# EAGLE board PCB (EAGLE 9.7.0)
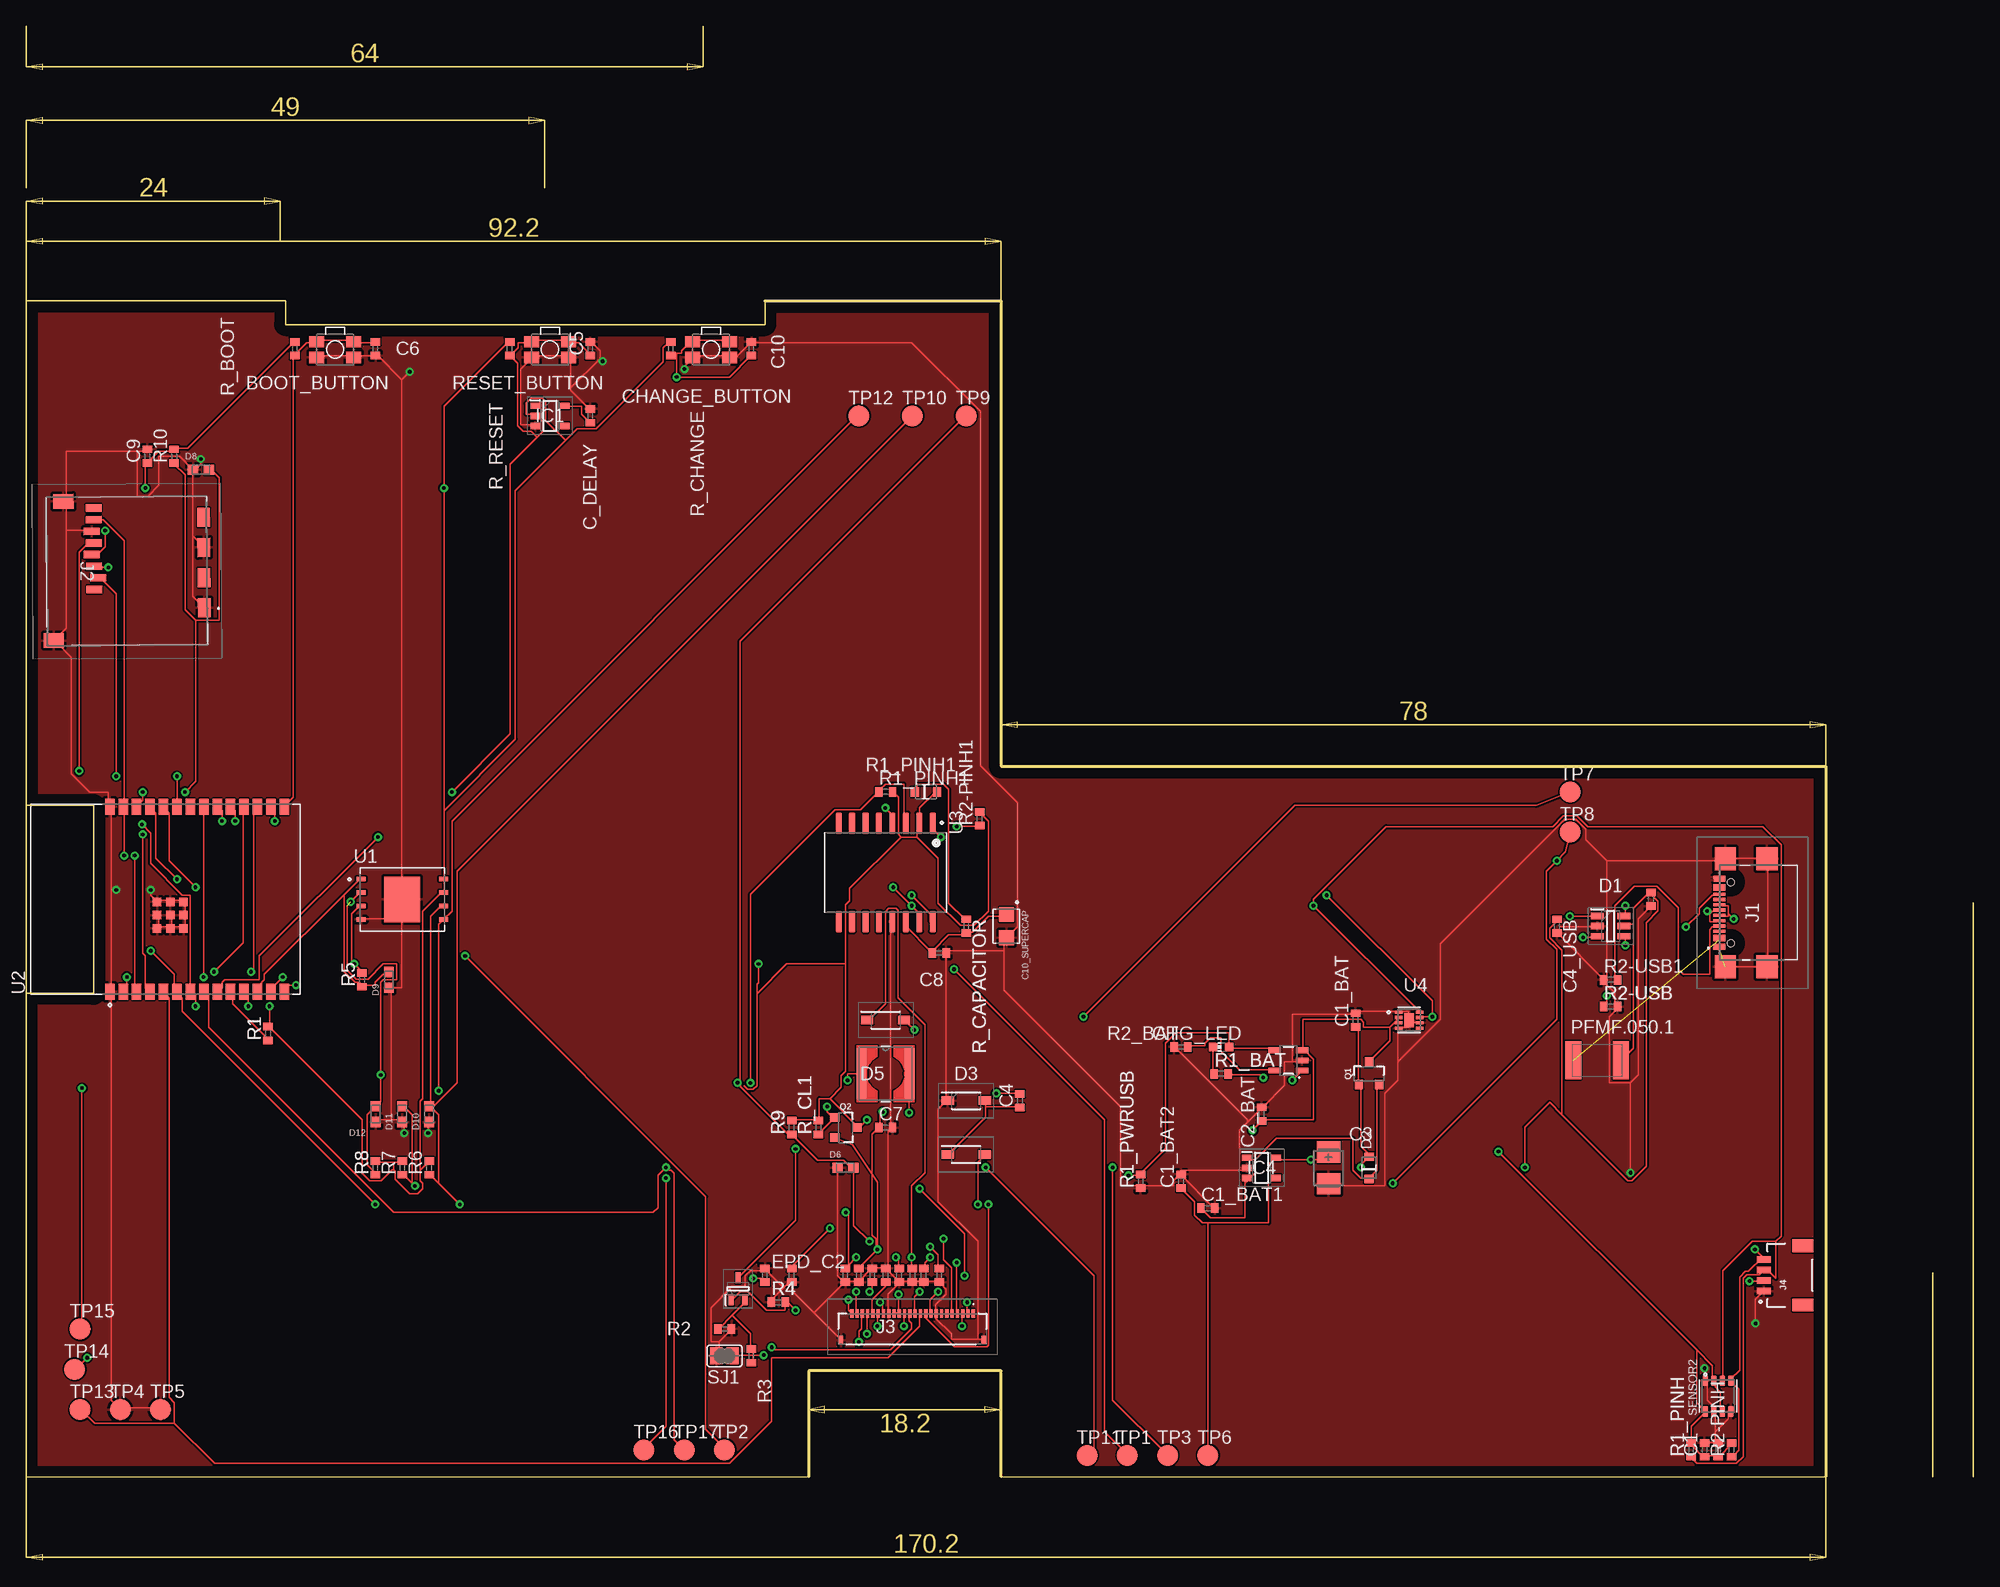
[diagram p0: board, top side]
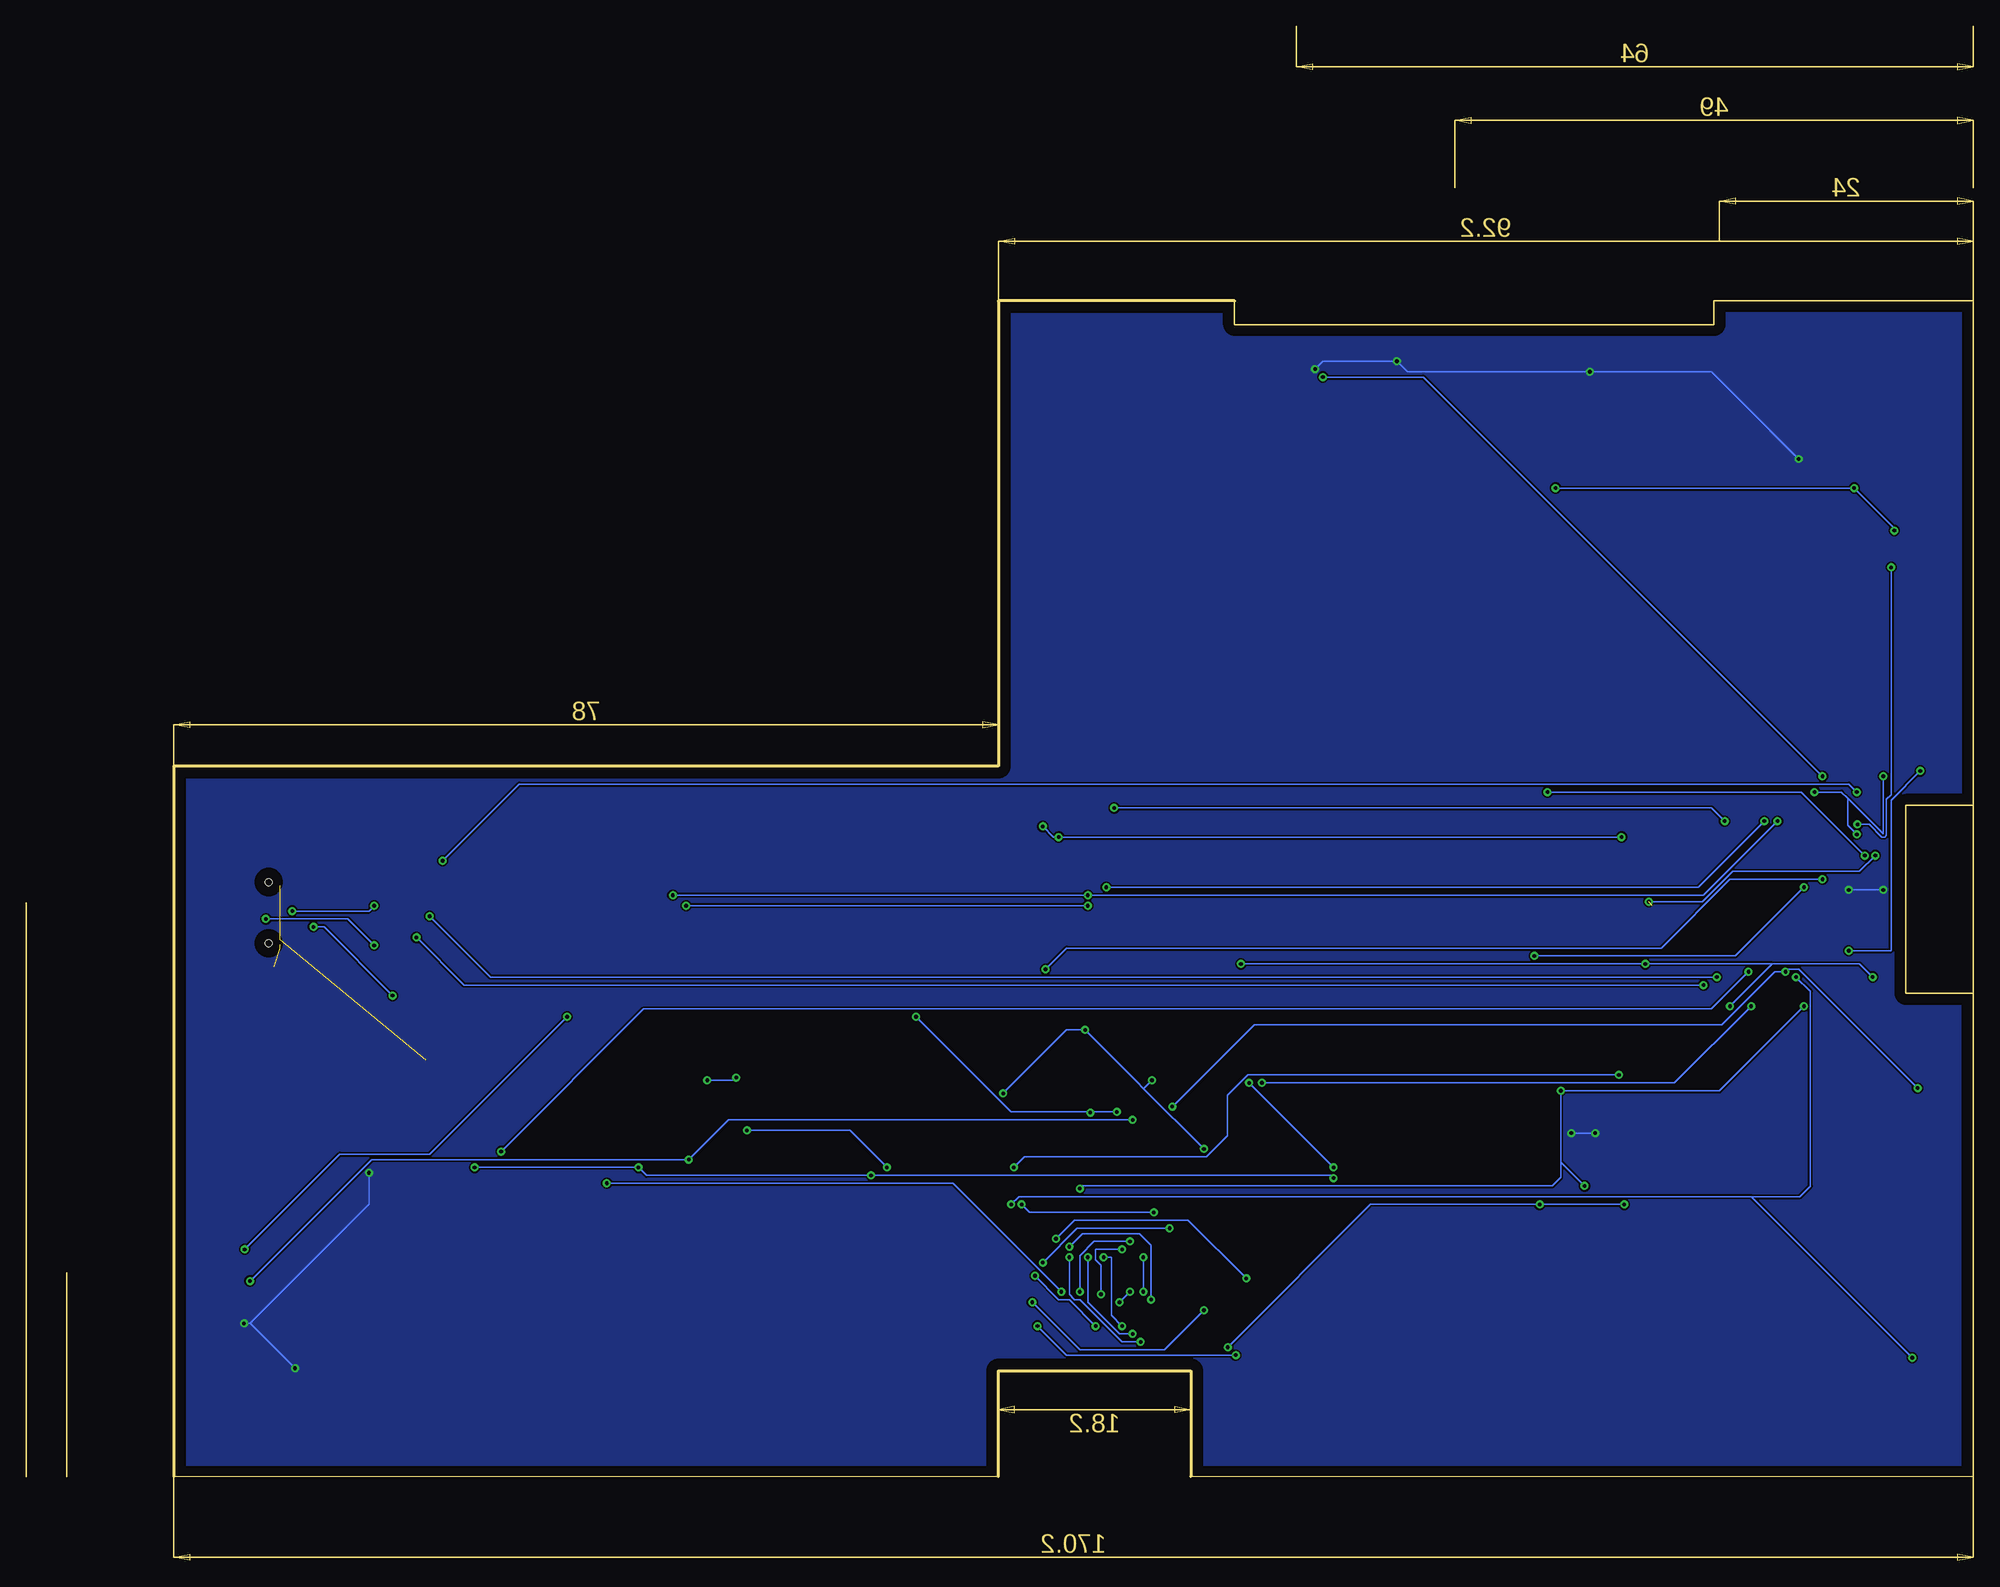
[diagram p1: board, bottom side, seen from below]

Size 170.2 x 111.2 mm. Coordinates in mm from the lower left corner, seen from the top.
Outline: 0,0 74,0 74,10 92.2,10 92.2,0 170.2,0 170.2,67.2 92.2,67.2 92.2,111.2 69.85,111.2 69.85,108.97 24.5,108.97 24.5,111.2 0,111.2 0,63.5 6.35,63.5 6.35,45.72 0,45.72 0,0
Copper layers (1*16): Top 0.035mm / dielectric 1.5mm / Bottom 0.035mm
Design rules "Fusion Electronics Design Rules": minimum track width 6mil, minimum drill 0.35mm, track to track 6mil, track to pad 6mil, pad to pad 6mil, via to via 6mil, smd to smd 6mil, copper to edge 40mil, drill to drill 6mil, minimum pad ring 10mil, minimum via ring 8mil, stop-mask expansion 4mil, vias tented up to drill 9999mil, thermal gap 10mil

## Footprints (pad centres in the part's own frame; a part is rotated, then mirrored left to right if it is on the bottom)
MYBUTTON = smd 1.4 x 1.05: 1 1.75,0.75; 2 -1.75,0.75; 3 -1.75,-0.75; 4 1.75,-0.75
EAGLE-LTSPICE_C0402 = smd 0.7 x 0.9: 1 -0.65,0; 2 0.65,0
ESP32_WROVER_EAGLE-LTSPICE_C0402 = smd 0.7 x 0.9: 1 -0.65,0; 2 0.65,0
RCL_CT3528 = smd 2 x 2.2: + -1.5,0; - 1.5,0
CAPCP3225X100N = smd 1.4 x 1.4: 1 -1.1,0; 2 1.1,0
ADAFRUIT_CHIP-LED0603 = smd 0.8 x 0.8: A 0,-0.75; C 0,0.75
SOT95P280X145-6N = smd 1.2 x 0.6: 1 -1.25,0.95; 2 -1.25,0; 3 -1.25,-0.95; 4 1.25,-0.95; 5 1.25,0; 6 1.25,0.95
ESP32_WROVER_AVX---SD0805S020S1R0_AVX_SD0805S020S1R0_0 = smd 0.8 x 0.9: 1 -1.05,0; 2 1.05,0
SOD3716X135N = smd 1.15 x 0.8: 1 -1.75,0; 2 1.75,0
DIOC1608X36N = smd 0.97 x 0.94: 1 -0.75,0; 2 0.75,0
SOT95P280X125-5N = smd 0.9 x 0.6: 1 -1.4,0.95; 2 -1.4,0; 3 -1.4,-0.95; 4 1.4,-0.95; 5 1.4,0.95
SOT95P280X120-5N = smd 0.9 x 0.6: 1 -1.4,0.95; 2 -1.4,0; 3 -1.4,-0.95; 4 1.4,-0.95; 5 1.4,0.95
SAMACSYS_PARTS_USB4110GFA = smd 0.3 x 1.15: A1 -3.35,3.678; A4 -2.55,3.678; A5 -1.25,3.678; A6 -0.25,3.678; A7 0.25,3.678; A8 1.25,3.678; A9 2.55,3.678; A12 3.35,3.678; B4 2.25,3.678; B5 1.75,3.678; B6 0.75,3.678; B7 -0.75,3.678; B8 -1.75,3.678; B9 -2.25,3.678 | smd 0.249 x 1.099: B1 3.05,3.678; B12 -3.05,3.678 | smd 2.18 x 2: MP1 -5.11,-0.827; MP2 5.11,-0.827; MP3 -5.11,3.103; MP4 5.11,3.103 | hole 0.65: -2.89,2.603; 2.89,2.603
112ATAARR03ATTEND = smd 1.8 x 1.2: G1 10.6,10.4; G2 4.9,10.4; S1 7.75,10.4; S2 2.05,10.4 | smd 1.4 x 1.9: G3 13.6,-3.85; G4 0.45,-2.85 | smd 0.7 x 1.5: P1 8.8,0; P2 7.7,0.4; P3 6.6,0; P4 5.5,-0.2; P5 4.4,0; P6 3.3,-0.2; P7 2.2,0; P8 1.1,0
FH34SRJ24S05SH99 = smd 0.3 x 0.8: 1 5.75,1.45; 2 5.25,1.45; 3 4.75,1.45; 4 4.25,1.45; 5 3.75,1.45; 6 3.25,1.45; 7 2.75,1.45; 8 2.25,1.45; 9 1.75,1.45; 10 1.25,1.45; 11 0.75,1.45; 12 0.25,1.45; 13 -0.25,1.45; 14 -0.75,1.45; 15 -1.25,1.45; 16 -1.75,1.45; 17 -2.25,1.45; 18 -2.75,1.45; 19 -3.25,1.45; 20 -3.75,1.45; 21 -4.25,1.45; 22 -4.75,1.45; 23 -5.25,1.45; 24 -5.75,1.45 | smd 0.4 x 0.8: MP1 6.75,-1.05; MP2 -6.75,-1.05
JST04_1MM_RA = smd 0.6 x 1.35: 1 -1.5,0; 2 -0.5,0; 3 0.5,0; 4 1.5,0 | smd 1.2 x 2: NC1 2.8,-3.675; NC2 -2.8,-3.675
IND_4828-WE-TPC_WRE = smd 0.889 x 4.826: 1 -2.286,0; 2 2.286,0
ESP32_WROVER_SPARKFUN-IC-POWER_SOT23-5 = smd 0.55 x 1.2: 1 -0.95,-1.3; 2 0,-1.3; 3 0.95,-1.3; 4 0.95,1.3; 5 -0.95,1.3
ESP32C6_VARISTOR_CT/CN1812 = smd 1.5 x 3.6: 1 -2.25,0; 2 2.25,0
ESP32_WROVER_SPARKFUN-DISCRETESEMI_SOT23-3 = smd 0.8 x 0.9: 1 -0.95,-1; 2 0.95,-1; 3 0,1.1
SOT65P210X110-3N = smd 1.05 x 0.5: 1 -1.05,0.65; 2 -1.05,-0.65; 3 1.05,0
ESP32_WROVER_EAGLE-LTSPICE_R0402 = smd 0.7 x 0.9: 1 -0.65,0; 2 0.65,0
ESP32_WROVER_BME680_PSON80P300X300X100-8N = smd 1.016 x 0.5: 1 1.458,1.2; 2 1.458,0.4; 3 1.458,-0.4; 4 1.458,-1.2; 5 -1.458,-1.22; 6 -1.458,-0.4; 7 -1.458,0.4; 8 -1.458,1.2
SJ = smd 1.168 x 1.6: 1 -0.762,0; 2 0.762,0
TP20R = smd 2 x 2: TP 0,0
SON127P600X800X80-9N = smd 0.94 x 0.44: 1 -3.895,1.905; 2 -3.895,0.635; 3 -3.895,-0.635; 4 -3.895,-1.905; 5 3.895,-1.905; 6 3.895,-0.635; 7 3.895,0.635; 8 3.895,1.905 | smd 3.4 x 4.3: 9 0,0
XCVR_ESP32-C6-WROOM-1-N8 = smd 1.5 x 0.9: 1 -8.75,5.26; 2 -8.75,3.99; 3 -8.75,2.72; 4 -8.75,1.45; 5 -8.75,0.18; 6 -8.75,-1.09; 7 -8.75,-2.36; 8 -8.75,-3.63; 9 -8.75,-4.9; 10 -8.75,-6.17; 11 -8.75,-7.44; 12 -8.75,-8.71; 13 -8.75,-9.98; 14 -8.75,-11.25; 15 8.75,-11.25; 16 8.75,-9.98; 17 8.75,-8.71; 18 8.75,-7.44; 19 8.75,-6.17; 20 8.75,-4.9; 21 8.75,-3.63; 22 8.75,-2.36; 23 8.75,-1.09; 24 8.75,0.18; 25 8.75,1.45; 26 8.75,2.72; 27 8.75,3.99; 28 8.75,5.26 | smd 0.8 x 0.8: 29_1 -2.755,0.79; 29_2 -1.505,0.79; 29_3 -0.255,0.79; 29_4 -2.755,-0.46; 29_5 -1.505,-0.46; 29_6 -0.255,-0.46; 29_7 -2.755,-1.71; 29_8 -1.505,-1.71; 29_9 -0.255,-1.71
SOIC127P1032X265-16N = smd 2.05 x 0.59: 1 -4.655,4.445; 2 -4.655,3.175; 3 -4.655,1.905; 4 -4.655,0.635; 5 -4.655,-0.635; 6 -4.655,-1.905; 7 -4.655,-3.175; 8 -4.655,-4.445; 9 4.655,-4.445; 10 4.655,-3.175; 11 4.655,-1.905; 12 4.655,-0.635; 13 4.655,0.635; 14 4.655,1.905; 15 4.655,3.175; 16 4.655,4.445
SON50P200X200X80-9N = smd 0.76 x 0.27: 1 -0.985,0.75; 2 -0.985,0.25; 3 -0.985,-0.25; 4 -0.985,-0.75; 5 0.985,-0.75; 6 0.985,-0.25; 7 0.985,0.25; 8 0.985,0.75 | smd 0.9 x 1.3: 9 0,0

## Placement (x,y rotation side)
BOOT_BUTTON  BUTTON_CUSYOMV1  [MYBUTTON]  29.21,106.6 180 top
C1  100nF  [EAGLE-LTSPICE_C0402]  158.75,2.54 90 top
C1_BAT  4.7uF  [ESP32_WROVER_EAGLE-LTSPICE_C0402]  125.73,43.18 90 top
C1_BAT1  4.7uF  [EAGLE-LTSPICE_C0402]  111.76,25.4 0 top
C1_BAT2  4.7uF  [EAGLE-LTSPICE_C0402]  109.22,27.94 90 top
C2  100nF  [EAGLE-LTSPICE_C0402]  160.02,2.54 90 top
C2_BAT  4.7uF  [EAGLE-LTSPICE_C0402]  116.84,34.29 90 top
C3  100uF  [RCL_CT3528]  123.19,29.21 270 top
C4  4.7uF/25V  [EAGLE-LTSPICE_C0402]  93.98,35.56 90 top
C4_USB  100nF  [ESP32_WROVER_EAGLE-LTSPICE_C0402]  144.78,52.07 270 top
C5  1uF  [EAGLE-LTSPICE_C0402]  53.34,106.68 90 top
C5_USB  4.7uF  [ESP32_WROVER_EAGLE-LTSPICE_C0402]  153.67,54.61 270 top
C6  100nF  [EAGLE-LTSPICE_C0402]  33.02,106.68 270 top
C7  10uF  [EAGLE-LTSPICE_C0402]  81.28,33.02 0 top
C8  100nF  [EAGLE-LTSPICE_C0402]  86.36,49.53 0 top
C9  100nF  [ESP32_WROVER_EAGLE-LTSPICE_C0402]  11.43,96.52 90 top
C10  100nF  [EAGLE-LTSPICE_C0402]  68.58,106.68 90 top
C10_SUPERCAP  CPH3225A  [CAPCP3225X100N]  92.71,52.07 270 top
C_DELAY  100nF  [EAGLE-LTSPICE_C0402]  53.34,100.33 90 top
CHANGE_BUTTON  BUTTON_CUSYOMV1  [MYBUTTON]  64.77,106.6 180 top
CHG_LED  [ADAFRUIT_CHIP-LED0603]  113.03,40.64 90 top
D1  USBLC6-2SC6Y  [SOT95P280X145-6N]  149.86,52.07 0 top
D2  ESP32_WROVER_AVX---SD0805S020S1R0_AVX_SD0805S020S1R0_0_0AVX_SD0805S020S1R0_0_0  [ESP32_WROVER_AVX---SD0805S020S1R0_AVX_SD0805S020S1R0_0]  127,29.21 90 top
D3  MBR0530  [SOD3716X135N]  88.9,35.56 0 top
D4  MBR0530  [SOD3716X135N]  88.9,30.48 0 top
D5  MBR0530  [SOD3716X135N]  81.28,43.18 0 top
D6  PGB1010603MR  [DIOC1608X36N]  77.47,29.21 0 top
D7  ESP32_WROVER_AVX---SD0805S020S1R0_AVX_SD0805S020S1R0_0_0AVX_SD0805S020S1R0_0_0  [ESP32_WROVER_AVX---SD0805S020S1R0_AVX_SD0805S020S1R0_0]  85.09,64.77 0 top
D8  PGB1010603MR  [DIOC1608X36N]  16.51,95.25 0 top
D9  PGB1010603MR  [DIOC1608X36N]  34.29,46.99 90 top
D10  PGB1010603MR  [DIOC1608X36N]  38.1,34.29 90 top
D11  PGB1010603MR  [DIOC1608X36N]  35.56,34.29 90 top
D12  PGB1010603MR  [DIOC1608X36N]  33.02,34.29 90 top
EPD_C1  1uF/50V  [EAGLE-LTSPICE_C0402]  72.39,19.05 90 top
EPD_C2  1uF/50V  [EAGLE-LTSPICE_C0402]  69.85,19.05 270 top
EPD_C5  1uF/50V  [EAGLE-LTSPICE_C0402]  78.74,19.05 90 top
EPD_C6  1uF/50V  [EAGLE-LTSPICE_C0402]  80.01,19.05 270 top
EPD_C7  1uF/50V  [EAGLE-LTSPICE_C0402]  82.55,19.05 90 top
EPD_C8  1uF/50V  [EAGLE-LTSPICE_C0402]  81.28,19.05 270 top
EPD_C9  1uF/50V  [EAGLE-LTSPICE_C0402]  83.82,19.05 90 top
EPD_C10  [EAGLE-LTSPICE_C0402]  84.87,19.05 90 top
EPD_C11  1uF/50V  [EAGLE-LTSPICE_C0402]  77.47,19.05 90 top
EPD_C12  1uF/50V  [EAGLE-LTSPICE_C0402]  86.36,19.05 90 top
IC1  BD5229G-TR  [SOT95P280X125-5N]  49.53,100.33 0 top
IC4  XC6220A331MR-G  [SOT95P280X120-5N]  116.84,29.21 0 top
J1  SAMACSYS_PARTS_USB4110-GF-A  [SAMACSYS_PARTS_USB4110GFA]  163.83,53.34 90 top
J2  112A-TAAR-R03_ATTEND  [112ATAARR03ATTEND]  6.35,92.71 270.4 top
J3  FH34SRJ-24S-0.5SH_99_  [FH34SRJ24S05SH99]  83.82,13.97 0 top
J4  QWIIC_RIGHT_ANGLE  [JST04_1MM_RA]  164.36,19.05 90 top
L1  744043680IND_4828-WE-TPC_WRE  [IND_4828-WE-TPC_WRE]  81.28,38.1 0 top
MCP73831  ESP32_WROVER_SPARKFUN-IC-POWER_MCP73831  [ESP32_WROVER_SPARKFUN-IC-POWER_SOT23-5]  119.38,39.37 90 top
PFMF.050.1  ESP32C6_VARISTORCN1812  [ESP32C6_VARISTOR_CT/CN1812]  148.59,39.37 0 top
Q1  20V/4.2A/52mΩ/1.4W  [ESP32_WROVER_SPARKFUN-DISCRETESEMI_SOT23-3]  127,38.1 0 top
Q2  20V/4.2A/52mΩ/1.4W  [ESP32_WROVER_SPARKFUN-DISCRETESEMI_SOT23-3]  77.47,33.02 270 top
Q3  SI1308EDL-T1-GE3  [SOT65P210X110-3N]  67.31,17.78 90 top
R1  10K  [ESP32_WROVER_EAGLE-LTSPICE_R0402]  22.86,41.91 90 top
R1_BAT  200  [ESP32_WROVER_EAGLE-LTSPICE_R0402]  113.03,38.1 0 top
R1_PINH  10k  [ESP32_WROVER_EAGLE-LTSPICE_R0402]  157.48,2.54 90 top
R1_PINH1  10k  [ESP32_WROVER_EAGLE-LTSPICE_R0402]  81.28,64.77 0 top
R1_PWRUSB  100k  [ESP32_WROVER_EAGLE-LTSPICE_R0402]  105.41,27.94 90 top
R2  2.2  [ESP32_WROVER_EAGLE-LTSPICE_R0402]  66.04,13.97 180 top
R2-PINH  10k  [ESP32_WROVER_EAGLE-LTSPICE_R0402]  161.29,2.54 90 top
R2-PINH1  10k  [ESP32_WROVER_EAGLE-LTSPICE_R0402]  90.17,62.23 90 top
R2-USB  5k1  [ESP32_WROVER_EAGLE-LTSPICE_R0402]  149.86,44.45 0 top
R2-USB1  5k1  [ESP32_WROVER_EAGLE-LTSPICE_R0402]  149.86,46.99 0 top
R2_BAT  2k  [ESP32_WROVER_EAGLE-LTSPICE_R0402]  109.22,40.64 0 top
R3  0.47  [ESP32_WROVER_EAGLE-LTSPICE_R0402]  68.58,11.43 90 top
R4  10K  [ESP32_WROVER_EAGLE-LTSPICE_R0402]  71.12,16.51 0 top
R5  10k  [ESP32_WROVER_EAGLE-LTSPICE_R0402]  31.75,46.99 90 top
R6  10k  [ESP32_WROVER_EAGLE-LTSPICE_R0402]  38.1,29.21 90 top
R7  10k  [ESP32_WROVER_EAGLE-LTSPICE_R0402]  35.56,29.21 90 top
R8  10k  [ESP32_WROVER_EAGLE-LTSPICE_R0402]  33.02,29.21 90 top
R9  10k  [ESP32_WROVER_EAGLE-LTSPICE_R0402]  72.39,33.02 90 top
R10  10k  [ESP32_WROVER_EAGLE-LTSPICE_R0402]  13.97,96.52 90 top
R_BOOT  10k  [ESP32_WROVER_EAGLE-LTSPICE_R0402]  25.4,106.68 90 top
R_CAPACITOR  15  [ESP32_WROVER_EAGLE-LTSPICE_R0402]  88.9,52.07 270 top
R_CHANGE  10k  [ESP32_WROVER_EAGLE-LTSPICE_R0402]  60.96,106.68 90 top
R_CL1  10k  [ESP32_WROVER_EAGLE-LTSPICE_R0402]  74.93,33.02 90 top
R_RESET  10k  [ESP32_WROVER_EAGLE-LTSPICE_R0402]  45.72,106.68 90 top
RESET_BUTTON  BUTTON_CUSYOMV1  [MYBUTTON]  49.53,106.6 180 top
SENSOR2  ESP32_WROVER_BME680_BME680  [ESP32_WROVER_BME680_PSON80P300X300X100-8N]  160.02,7.62 90 top
SJ1  [SJ]  66.04,11.43 0 top
TP1  TPTP20R  [TP20R]  104.14,2.02 0 top
TP2  TPTP20R  [TP20R]  66.04,2.54 0 top
TP3  TPTP20R  [TP20R]  107.95,2.02 0 top
TP4  TPTP20R  [TP20R]  8.89,6.35 0 top
TP5  TPTP20R  [TP20R]  12.7,6.35 0 top
TP6  TPTP20R  [TP20R]  111.76,2.02 0 top
TP7  TPTP20R  [TP20R]  146.05,64.77 0 top
TP8  TPTP20R  [TP20R]  146.05,60.96 0 top
TP9  TPTP20R  [TP20R]  88.9,100.33 0 top
TP10  TPTP20R  [TP20R]  83.82,100.33 0 top
TP11  TPTP20R  [TP20R]  100.33,2.02 0 top
TP12  TPTP20R  [TP20R]  78.74,100.33 0 top
TP13  TPTP20R  [TP20R]  5.08,6.35 0 top
TP14  TPTP20R  [TP20R]  4.56,10.16 0 top
TP15  TPTP20R  [TP20R]  5.08,13.97 0 top
TP16  TPTP20R  [TP20R]  58.42,2.54 0 top
TP17  TPTP20R  [TP20R]  62.23,2.54 0 top
U1  W25Q512JVEIQ  [SON127P600X800X80-9N]  35.56,54.61 0 top
U2  ESP32-C6-WROOM-1-N8  [XCVR_ESP32-C6-WROOM-1-N8]  13.15,54.61 90 top
U3  DS3231SN#  [SOIC127P1032X265-16N]  81.28,57.15 270 top
U4  MAX17048G+T10  [SON50P200X200X80-9N]  130.81,43.18 0 top

## Library data of the parts
BOOT_BUTTON CHANGE_BUTTON CHG_LED PFMF.050.1 RESET_BUTTON SJ1 TP1-TP17 = DeskAssistant v19 v1
C1 C1_BAT C1_BAT1 C1_BAT2 C2 C2_BAT C4 C4_USB C5 C5_USB C6-C10 C_DELAY EPD_C1 EPD_C2 EPD_C5-EPD_C12 = DeskAssistant v19 v1; SPICEMODEL: NONE; SPICEPREFIX: C
C3 = DeskAssistant v19 v1; SPICEPREFIX: C
C10_SUPERCAP = DeskAssistant v19 v1; AVAILABILITY: Not in stock; CHECK_PRICES: https://www.snapeda.com/parts/CPH3225A/Seiko+Instruments/view-part/?ref=eda; DESCRIPTION: 11 mF (EDLC) Supercapacitor 3.3 V 1210 (3225 Metric) - -; MF: Seiko Instruments; MP: CPH3225A; PACKAGE: 1210 Seiko; PRICE: None; PURCHASE-URL: https://www.snapeda.com/api/url_track_click_mouser/?unipart_id=562593&manufacturer=Seiko Instruments&part_name=CPH3225A&search_term=None; SNAPEDA_LINK: https://www.snapeda.com/parts/CPH3225A/Seiko+Instruments/view-part/?ref=snap
D1 = DeskAssistant v19 v1; AVAILABILITY: In Stock; CHECK_PRICES: https://www.snapeda.com/parts/USBLC6-2SC6Y/STMicroelectronics/view-part/?ref=eda; DESCRIPTION: 17V Clamp 5A (8/20µs) Ipp Tvs Diode Surface Mount SOT-23-6; MF: STMicroelectronics; MP: USBLC6-2SC6Y; PACKAGE: SOT-23-6 STMicroelectronics; PRICE: None; SNAPEDA_LINK: https://www.snapeda.com/parts/USBLC6-2SC6Y/STMicroelectronics/view-part/?ref=snap
D2 D7 = DeskAssistant v19 v1; CENTROID_NOT_SPECIFIED: No; DATASHEET: http://datasheets.avx.com/schottky.pdf; DIGIKEY_DESCRIPTION: DIODE SCHOTTKY 20V 1A 0805; DIGIKEY_PART_NUMBER: 478-7800-1-ND; LEAD_FREE: yes; MF: AVX; MOUSER_PART_NUMBER: 581-SD0805S020S1R0; PACKAGE: 0805 (2012 metric); PREFIX: D; ROHS: yes; TEMPERATURE_RANGE_HIGH: +125°C; TEMPERATURE_RANGE_LOW: -55°C
D3-D5 = DeskAssistant v19 v1; AVAILABILITY: In Stock; CHECK_PRICES: https://www.snapeda.com/parts/MBR0530/Onsemi/view-part/?ref=eda; DESCRIPTION: Diode Schottky 30 V 500mA Surface Mount SOD-123; MF: ON Semiconductor; MP: MBR0530; PACKAGE: SOD-123-2 ON Semiconductor; PRICE: None; PURCHASE-URL: https://www.snapeda.com/api/url_track_click_mouser/?unipart_id=179458&manufacturer=ON Semiconductor&part_name=MBR0530&search_term=None; SNAPEDA_LINK: https://www.snapeda.com/parts/MBR0530/Onsemi/view-part/?ref=snap
D6 D8-D12 = DeskAssistant v19 v1; AVAILABILITY: In Stock; CHECK_PRICES: https://www.snapeda.com/parts/PGB1010603MR/Littelfuse/view-part/?ref=eda; DESCRIPTION: 150V (Typ) Clamp - Ipp Tvs Diode Surface Mount 0603 (1608 Metric); MF: Littelfuse Inc.; MP: PGB1010603MR; PACKAGE: 0603 Littelfuse Inc.; PRICE: None; PURCHASE-URL: https://www.snapeda.com/api/url_track_click_mouser/?unipart_id=5659453&manufacturer=Littelfuse Inc.&part_name=PGB1010603MR&search_term=None; SNAPEDA_LINK: https://www.snapeda.com/parts/PGB1010603MR/Littelfuse/view-part/?ref=snap
IC1 = DeskAssistant v19 v1; DESCRIPTION: Voltage Detector with Adjustable Delay Time: CMOS processes are utilized to develop high precision, low current consumption CMOS reset ICs that allow arbitrary setting of the delay time. The extensive lineup includes both Nch Open Drain and CMOS output types in a wide range of detection voltages (from 2.3V to 6.0V, in 0.1V steps), enabling selection of the ideal solution based on customer requirements. In addition, the entire series is of course both lead-free and RoHS-compliant.; HEIGHT: 1.25mm; MANUFACTURER_NAME: ROHM Semiconductor; MANUFACTURER_PART_NUMBER: BD5229G-TR; MOUSER_PART_NUMBER: 755-BD5229G-TR; MOUSER_PRICE-STOCK: https://www.mouser.co.uk/ProductDetail/ROHM-Semiconductor/BD5229G-TR?qs=4kLU8WoGk0vvnhrrYwdszw%3D%3D
IC4 = DeskAssistant v19 v1; DESCRIPTION: LDO Voltage Regulators; HEIGHT: 1.2mm; MANUFACTURER_NAME: Torex; MANUFACTURER_PART_NUMBER: XC6220A331MR-G; MOUSER_PART_NUMBER: 865-XC6220A331MR-G; MOUSER_PRICE-STOCK: https://www.mouser.co.uk/ProductDetail/Torex-Semiconductor/XC6220A331MR-G?qs=AsjdqWjXhJ8ZSWznL1J0gg%3D%3D
J1 = DeskAssistant v19 v1; DESCRIPTION: CONN USB 2.0 TYPE-C R/A SMT; HEIGHT: 3.26mm; MANUFACTURER_NAME: GCT (GLOBAL CONNECTOR TECHNOLOGY); MANUFACTURER_PART_NUMBER: USB4110-GF-A; MOUSER_PART_NUMBER: 640-USB4110-GF-A; MOUSER_PRICE-STOCK: https://www.mouser.co.uk/ProductDetail/GCT/USB4110-GF-A?qs=KUoIvG%2F9IlYiZvIXQjyJeA%3D%3D
J2 = DeskAssistant v19 v1; DESCRIPTION: Micro SD Card Socket, Push-Push Type, Top Mount, SMT, H=1.83mm, 10u; HEIGHT: 1.9mm; MANUFACTURER_NAME: ATTEND; MANUFACTURER_PART_NUMBER: 112A-TAAR-R03 ATTEND
J3 = DeskAssistant v19 v1; DESCRIPTION: 24 Position FFC, FPC Connector Contacts, Top and Bottom 0.020" (0.50mm) Surface Mount, Right Angle; HEIGHT: 1.1mm; MANUFACTURER_NAME: Hirose; MANUFACTURER_PART_NUMBER: FH34SRJ-24S-0.5SH(99); MOUSER_PART_NUMBER: 798-FH34SRJ24S05SH99; MOUSER_PRICE-STOCK: https://www.mouser.co.uk/ProductDetail/Hirose-Connector/FH34SRJ-24S-0.5SH99?qs=vcbW%252B4%252BSTIpKBl5ap9J8Fw%3D%3D
J4 = DeskAssistant v19 v1; PROD_ID: CONN-13694
L1 = DeskAssistant v19 v1; COPYRIGHT: Copyright (C) 2024 Ultra Librarian. All rights reserved.; MANUFACTURER_PART_NUMBER: 744043680; MFR_NAME: Wurth Electronics
MCP73831 = DeskAssistant v19 v1; PROD_ID: IC-09995
Q1 Q2 = DeskAssistant v19 v1; PROD_ID: TRAN-14388
Q3 = DeskAssistant v19 v1; AVAILABILITY: In Stock; CHECK_PRICES: https://www.snapeda.com/parts/SI1308EDL-T1-GE3/Vishay+Siliconix/view-part/?ref=eda; DESCRIPTION: Si1308EDL-T1-GE3 N-channel MOSFET Transistor, 1.5 A, 30 V, 3-Pin SC-70 | Siliconix / Vishay SI1308EDL-T1-GE3; MF: Vishay Siliconix; MP: SI1308EDL-T1-GE3; PACKAGE: SOT-323 Vishay Semiconductor; PRICE: None; PURCHASE-URL: https://www.snapeda.com/api/url_track_click_mouser/?unipart_id=274603&manufacturer=Vishay Siliconix&part_name=SI1308EDL-T1-GE3&search_term=None; SNAPEDA_LINK: https://www.snapeda.com/parts/SI1308EDL-T1-GE3/Vishay+Siliconix/view-part/?ref=snap
R1 R1_BAT R1_PINH R1_PINH1 R1_PWRUSB R2 R2-PINH R2-PINH1 R2-USB R2-USB1 R2_BAT R3-R10 R_BOOT R_CAPACITOR R_CHANGE R_CL1 R_RESET = DeskAssistant v19 v1; SPICEMODEL: NONE; SPICEPREFIX: R
SENSOR2 = DeskAssistant v19 v1; AVAILABILITY: Unavailable; DESCRIPTION: Integrated Environmental Unit; MF: Bosch Sensortec; MP: BME680; PACKAGE: LGA-8 Bosch Tools; PRICE: None
U1 = DeskAssistant v19 v1; AVAILABILITY: In Stock; CHECK_PRICES: https://www.snapeda.com/parts/W25Q512JVEIQ/Winbond+Electronics/view-part/?ref=eda; DESCRIPTION: FLASH - NOR Memory IC 512Mb (64M x 8) SPI - Quad I/O 133 MHz 8-WSON (8x6); MF: Winbond Electronics; MP: W25Q512JVEIQ; PACKAGE: Package; PRICE: None; SNAPEDA_LINK: https://www.snapeda.com/parts/W25Q512JVEIQ/Winbond+Electronics/view-part/?ref=snap
U2 = DeskAssistant v19 v1; AVAILABILITY: In Stock; CHECK_PRICES: https://www.snapeda.com/parts/ESP32-C6-WROOM-1-N8/Espressif+Systems/view-part/?ref=eda; DESCRIPTION: Multiprotocol Modules ESP32-C6 module, Wi-Fi 6 in 2.4 GHz band, Bluetooth 5, Zigbee 3.0 and Thread. ESP34-WROOM Compatible - ENGINEERING SAMPLE; MF: Espressif Systems; MP: ESP32-C6-WROOM-1-N8; PACKAGE: None; PRICE: None; SNAPEDA_LINK: https://www.snapeda.com/parts/ESP32-C6-WROOM-1-N8/Espressif+Systems/view-part/?ref=snap
U3 = DeskAssistant v19 v1; AVAILABILITY: In Stock; CHECK_PRICES: https://www.snapeda.com/parts/DS3231SN%23/Analog+Devices/view-part/?ref=eda; DESCRIPTION: Extremely Accurate I²C-Integrated RTC/TCXO/Crystal; MF: Analog Devices; MP: DS3231SN#; PACKAGE: SOIC-16 Maxim; PRICE: None; PURCHASE-URL: https://www.snapeda.com/api/url_track_click_mouser/?unipart_id=99048&manufacturer=Analog Devices&part_name=DS3231SN#&search_term=None; SNAPEDA_LINK: https://www.snapeda.com/parts/DS3231SN%23/Analog+Devices/view-part/?ref=snap
U4 = DeskAssistant v19 v1; AVAILABILITY: In Stock; CHECK_PRICES: https://www.snapeda.com/parts/MAX17048G+T10/Analog+Devices/view-part/?ref=eda; DESCRIPTION: 3µA 1-Cell/2-Cell Fuel Gauge with ModelGauge; MF: Analog Devices; MP: MAX17048G+T10; PACKAGE: TDFN-8 Maxim; PRICE: None; PURCHASE-URL: https://www.snapeda.com/api/url_track_click_mouser/?unipart_id=329239&manufacturer=Analog Devices&part_name=MAX17048G+T10&search_term=None; SNAPEDA_LINK: https://www.snapeda.com/parts/MAX17048G+T10/Analog+Devices/view-part/?ref=snap

## Nets
3V3: C1_BAT2.1 C3.+ C9.1 D7.2 IC1.2 IC4.5 J2.P4 J4.2 Q2.3 R1.2 R1_PINH1.2 R2-PINH1.2 R5.2 R6.2 R7.2 R8.2 R9.2 R10.2 R_BOOT.2 R_CHANGE.2 R_CL1.2 R_RESET.2 TP6.TP U1.3 U1.7 U1.8 U2.2 U3.2
32KHZ: R2-PINH1.1 U2.9 U3.1
DN: D1.6 J1.A7 J1.B7
DP: D1.4 J1.A6 J1.B6
EPD_3V3: C7.1 EPD_C5.2 J3.15 J3.16 L1.2 Q2.2 TP7.TP
EPD_3V3_C: Q2.1 R_CL1.1 TP15.TP U2.18
EPD_BUSY: J3.9 TP8.TP U2.26
EPD_CS: D6.2 J3.12 R9.1 TP9.TP U2.11
EPD_DC: J3.11 TP13.TP U2.5
EPD_RST: J3.10 TP14.TP U2.21
FLASH_CS: D9.2 R5.1 U1.1 U2.12
GDR: J3.2 Q3.1 R4.2
GND: BOOT_BUTTON.1 BOOT_BUTTON.2 C1.2 C1_BAT1.2 C1_BAT2.2 C1_BAT.2 C2.2 C2_BAT.2 C3.- C4_USB.2 C5.2 C5_USB.2 C6.2 C7.2 C8.2 C9.2 C10.2 C10_SUPERCAP.2 C_DELAY.2 CHANGE_BUTTON.1 CHANGE_BUTTON.2 D1.2 D3.1 D6.1 D8.1 D9.1 D10.1 D11.1 D12.1 EPD_C1.1 EPD_C2.1 EPD_C5.1 EPD_C6.1 EPD_C7.1 EPD_C8.1 EPD_C9.1 EPD_C10.1 EPD_C11.1 EPD_C12.1 IC1.3 IC4.2 J1.A1 J1.A12 J1.B1 J1.B12 J1.MP1 J1.MP2 J1.MP3 J1.MP4 J2.G1 J2.G2 J2.G3 J2.G4 J2.P6 J3.8 J3.17 J3.MP1 J3.MP2 J4.1 MCP73831.2 R1_PWRUSB.1 R2-USB1.1 R2-USB.2 R2.1 R2_BAT.1 R4.1 RESET_BUTTON.1 RESET_BUTTON.2 SENSOR2.1 SENSOR2.5 SENSOR2.7 SJ1.1 TP4.TP TP5.TP U1.4 U1.9 U2.1 U2.28 U2.29_1 U2.29_2 U2.29_3 U2.29_4 U2.29_5 U2.29_6 U2.29_7 U2.29_8 U2.29_9 U3.13 U4.1 U4.4 U4.6 U4.9
GPIO8: R1.1 U2.10
I2C_PW: C1.1 C2.1 R1_PINH.2 R2-PINH.2 SENSOR2.2 SENSOR2.6 SENSOR2.8 U2.17
INT_RTC: R1_PINH1.1 TP17.TP U2.8 U3.3
IO/BOOT: BOOT_BUTTON.3 BOOT_BUTTON.4 C6.1 R_BOOT.1 U2.15
IO/CHANGE: C10.1 CHANGE_BUTTON.3 CHANGE_BUTTON.4 R_CHANGE.1 U2.23
MISO: D12.2 J2.P7 R8.1 TP11.TP U1.2 U2.27
MOSI: D11.2 J2.P3 J3.14 R7.1 TP12.TP U1.5 U2.7
N$1: C_DELAY.1 IC1.5
N$2: J1.B5 R2-USB.1
N$3: J1.A5 R2-USB1.2
N$4: C1_BAT1.1 D2.1 IC4.1 IC4.3 Q1.2
N$5: C4.1 D3.2 D4.1
N$6: MCP73831.1 R1_BAT.2
N$7: CHG_LED.C R1_BAT.1
N$8: MCP73831.5 R2_BAT.2
N$9: EPD_C1.2 J3.4
N$10: EPD_C2.2 J3.5
N$11: EPD_C12.2 J3.24
N$13: EPD_C10.2 J3.22
N$15: EPD_C8.2 J3.20
N$16: EPD_C7.2 J3.19
N$17: EPD_C6.2 J3.18
N$18: D7.1 R_CAPACITOR.1
PREVGH: D5.1 EPD_C9.2 J3.21
PREVGL: D4.2 EPD_C11.2 J3.23
RESE: J3.3 Q3.2 R2.2 R3.1 R3.2 SJ1.2
RESET: C5.1 IC1.1 R_RESET.1 RESET_BUTTON.3 RESET_BUTTON.4 U2.3
RTC_RST: U2.16 U3.4
RX: TP2.TP U2.24
SCK: D10.2 J2.P5 J3.13 R6.1 TP10.TP U1.6 U2.6
SCL: J4.4 R2-PINH.1 SENSOR2.4 U2.20 U3.16 U4.7
SDA: J4.3 R1_PINH.1 SENSOR2.3 U2.19 U3.15 U4.8
SRC: C4.2 D5.2 L1.1 Q3.3
SS_SD: D8.2 J2.P2 R10.1 U2.4
TX: TP1.TP U2.25
USB_D+: D1.3 U2.14
USB_D-: D1.1 U2.13
VBAT: C2_BAT.1 MCP73831.3 Q1.3 TP3.TP U4.2 U4.3
VBUS: C1_BAT.1 C4_USB.1 C5_USB.1 CHG_LED.A D1.5 D2.2 MCP73831.4 PFMF.050.1.2 Q1.1 R1_PWRUSB.2 TP16.TP
VRTC: C8.1 C10_SUPERCAP.1 R_CAPACITOR.2 U3.14
VUSB: J1.A4 J1.A9 J1.B4 J1.B9 PFMF.050.1.1

## Tracks (layer width: path | path; a pad name or v marks a point on that pad's centre or on a via)
3V3  (via drill 0.35)
  Top 0.152: R_BOOT.2 25.25,107.25 15.25,97.25 14,97.25 R10.2 13.75,97 12.5,97 11.5,96 C9.1 11.25,95.75 v11.25,93.5 | IC1.2 48,100.5 47.25,100.5 47.25,101.5 47.75,102 48.8,102 49.11,101.69 49.11,99.89 51,98 | R_CHANGE.2 60.75,107.25 60.25,106.75 60.25,105.47 53.88,99.1 52.1,99.1 51,98 | 39.5,56.5 39.5,63 | 39.5,63 v39.5,93.5 39.5,101.25 45.5,107.25 R_RESET.2 | 39.5,56.5 39.5,55.25 U1.7 39.25,55.25 37.5,53.5 37.5,35.75 37.25,35.5 37.25,29 | 39.5,56.5 U1.8 | 51,98 46.25,93.25 46.25,69.75 39.5,63 | 111.75,24 117.5,24 117.5,29.5 118,30 IC4.5 118.25,30 v121.5,30 123,30 123,30.5 C3.+ | 111.75,24 111.25,24 110.5,24.75 110.5,26 109.25,27.25 C1_BAT2.1 | 111.75,24 111.75,2.25 TP6.TP | v163,18.5 164.25,18.5 J4.2 | R9.2 72.5,33.75 74.75,33.75 R_CL1.2 75,33.75 75,35.75 76,35.75 | 76,35.75 78.5,33.25 Q2.3 78.75,33 v79.5,33.75 | 82.75,60.5 82.5,60.75 82.5,64.25 82,64.75 R1_PINH1.2 | 84.25,60.5 82.75,60.5 | 84.25,60.5 84.25,61.75 U3.2 84.5,62 84.5,63.25 86,64.75 D7.2 | 84.25,60.5 86.25,58.5 86.25,54.25 88.36,52.14 89.64,52.14 91,53.5 91,62 90.25,62.75 R2-PINH1.2 | R5.2 31.75,47.75 v31,48.5 30.75,48.75 30.75,53.25 31.5,54 U1.3 | 34.75,29.75 35.5,29.75 R7.2 | 34.75,29.75 33.25,29.75 R8.2 | 37.25,29 38,29.75 R6.2 | 37.25,29 37.25,28 37.5,27.75 37.5,27.25 37,26.75 36.25,26.75 34.88,28.11 34.88,28.89 34.75,29.02 | 34.75,29.75 34.75,29.02 | v9.5,47.25 9.5,46.25 9.25,46 U2.2 | v23,44.5 23,42.75 R1.2 23,42.5 31.75,33.75 31.75,28.71 32.48,27.98 33.56,27.98 34.6,29.02 34.75,29.02 | 77.5,48.5 77.5,38.36 77.07,37.92 77.07,36.82 76,35.75 | J2.P4 6.7,87.21 7.45,87.96 v7.45,89.48 | 77.5,48.5 71.91,48.5 69.11,45.7
  Top 0.152: 82.75,60.5 77.89,55.64 77.89,54.48 77.5,54.09 77.5,48.5 | v69.25,48.5 69.25,46.7 69.11,46.56 69.11,45.7 | 69.11,45.7 69.11,37 68.74,36.63 68.23,36.63 67.88,36.98 67.88,37
  Bottom 0.152: v39.5,93.5 v11.25,93.5 7.5,89.75 7.5,89.52 v7.45,89.48 | v163,18.5 151.5,30 v121.5,30 117.75,33.75 v79.5,33.75 | v9.5,47.25 10.75,48.5 19,48.5 | v23,44.5 19,48.5 | 19,48.5 v31,48.5 v69.25,48.5
32KHZ  (via drill 0.35)
  Top 0.152: v88,61.5 90,61.5 R2-PINH1.1 | v86.5,60.5 85.75,61.25 85.75,61.75 U3.1 | v33.25,60.5 22,49.25 22,47 18.75,47 18.5,46.75 18.5,46.25 18.25,46 U2.9
  Bottom 0.152: v88,61.5 87,60.5 v86.5,60.5 v33.25,60.5
DN  (via drill 0.35)
  Top 0.152: 159.25,53.25 159.25,52.5 160,52.5 J1.B7 | 159.25,53.25 159.5,53.5 160,53.5 J1.A7 | v151.25,54 151.25,53.25 D1.6 | 159.25,53.25 v159,53.5
  Bottom 0.152: v151.25,54 151.75,53.5 v159,53.5
DP  (via drill 0.35)
  Top 0.152: 161,53.25 161,54 160.25,54 J1.B6 | 161,53.25 161,53 160.25,53 J1.A6 | v151.25,50.25 151.25,51 D1.4 | v161.5,52.75 161,53.25
  Bottom 0.152: v151.25,50.25 153.75,52.75 v161.5,52.75
EPD_3V3  (via drill 0.35)
  Top 0.152: 82.5,15.5 82,15.5 J3.16 | v80.5,21.5 78.75,19.75 EPD_C5.2 | v80.5,21.5 80.5,27.85 78.14,31.38 Q2.2 | v82.5,17.25 82.5,15.5 | 82.5,15.5 J3.15 | v100,43.5 119.98,63.48 142.82,63.48 TP7.TP | v81,34.5 80.75,34.25 80.75,33.25 C7.1 80.01,32.4 80.01,22.85 80.36,22.5 80.36,21.64 v80.5,21.5 | v83.52,34.44 83.52,38.1 L1.2
  Bottom 0.152: v82.5,17.25 82.5,20 83,20.5 83,21.5 v80.5,21.5 | v100,43.5 91,34.5 83.52,34.5 | v81,34.5 83.52,34.5 | v83.52,34.44 83.52,34.5
EPD_3V3_C  (via drill 0.35)
  Top 0.152: R_CL1.1 75,32.5 Q2.1 76.25,34 75.75,34.5 v75.75,35 | v17.75,47.75 20.5,50.5 20.5,63.25 U2.18 | v5.25,36.75 5.25,14 TP15.TP
  Bottom 0.152: v5.25,36.75 16.5,48 17.5,48 v17.75,47.75 18.75,47.75 23.75,42.75 68,42.75 v75.75,35
EPD_BUSY  (via drill 0.35)
  Top 0.152: v86.25,17.5 85.5,16.75 85.5,15.5 J3.9 | v129.25,27.75 144.77,43.27 144.77,49.88 143.8,50.85 143.8,57.28 v144.77,58.25 145.6,59.08 TP8.TP | v11,64.75 11,64 10.5,63.5 U2.26
  Bottom 0.152: v86.25,17.5 96.5,27.75 v129.25,27.75 | v11,64.75 11.75,65.5 137.52,65.5 v144.77,58.25
EPD_CS  (via drill 0.35)
  Top 0.152: v84.5,17.5 84,17 84,15.5 J3.12 | v79.75,22.25 78.25,23.75 78.25,29 D6.2 78,29.21 77.3,29.91 74.85,29.91 R9.1 72.06,32.37 67.57,36.86 67.57,37.18 67.5,37.25 | v21,44.5 21,45.5 20.75,45.75 U2.11 | 67.5,37.25 67.5,79 88.75,100.25 TP9.TP | 67.5,37.25 v67.29,37.25 v67.28,37.26
  Bottom 0.152: v79.75,22.25 83.16,22.25 84.5,20.91 v84.5,17.5 | v67.28,37.26 28.24,37.26 v21,44.5
EPD_DC
  Top 0.152: 14,5.06 6.44,5.06 5.25,6.25 TP13.TP | 14,5.06 14,5.05 17.8,1.25 66.5,1.25 70.5,5.25 70.5,11.25 81.5,11.25 84.5,14.25 84.5,15.25 J3.11 | 14,5.06 14,7 13.5,7.5 13.5,45.25 13,45.75 U2.5
EPD_RST  (via drill 0.35)
  Top 0.152: v5.75,11.25 4.75,10.25 TP14.TP | J3.10 85,15.25 85,15.07 87.78,12.29 90.86,12.29 91,12.43 v91,25.75 | v16.75,47.25 16.75,63.25 U2.21
  Bottom 0.152: v91,25.75 90.25,26.5 21,26.5 | v5.75,11.25 21,26.5 | 21,26.5 16.37,26.5 15.39,27.48 15.39,45.89 v16.75,47.25
FLASH_CS
  Top 0.152: 31.75,46.5 33,46.5 33,46.75 33.75,47.5 34.25,47.5 D9.2 | 30.06,55.06 22.5,47.5 22.5,47 22,46.5 22,46 U2.12 | 30.06,55.06 31.5,56.5 U1.1 | 31.75,46.5 R5.1 | 31.75,46.5 31.49,46.76 31.08,46.76 30.06,47.78 30.06,55.06
GDR  (via drill 0.35)
  Top 0.152: v89,16.5 89,15.5 J3.2 | v72.75,15.75 72,16.5 R4.2 71.75,16.5 71.75,15.75 70,15.75 68.44,17.31 68.44,17.35 68.29,17.5 67.5,17.5 66.75,16.75 Q3.1
  Bottom 0.152: v89,16.5 84.5,12 76.5,12 v72.75,15.75
GND  (via drill 0.35)  (2 unrouted)
  Top 0.152: 159.75,3.25 160,3.25 C2.2 159.75,3.25 | 159.75,3.25 158.75,3.25 C1.2 | 159.75,3.25 159.75,4.25 | 159.75,4.25 159.75,6 SENSOR2.7 159.5,6.25 159.5,6.75 159,7.25 159,9 SENSOR2.1 158.75,9.25 v158.75,10.25 | 159.75,4.25 161,5.5 161,6 SENSOR2.5 | J1.MP3 160.75,48.25 164.5,48.25 J1.MP1 164.75,48.25 164.75,58.25 J1.MP2 164.5,58.5 160.75,58.5 J1.MP4 160.5,58.25 149.5,58.25 | 149.5,46.5 149.25,46.75 R2-USB1.1 149,47 149,47.25 145,51.25 C4_USB.2 145,51.5 145,52 148.5,52 D1.2 | 149.5,46.5 150.25,45.75 150.25,44.75 150.5,44.5 R2-USB.2 150.5,44.25 149.75,43.5 149.75,37.25 151.75,37.25 | 151.75,37.25 152.5,38 152.5,52.75 153.5,53.75 C5_USB.2 | 149.5,46.5 149.5,58.25 | 151.75,37.25 v151.75,28.75 | U4.9 130.75,43 130.75,42.5 130,42.5 U4.4 129.75,42.5 129.75,39.25 | U4.9 130.75,43.25 130.75,44 130,44 U4.1 129.75,44 125.75,44 C1_BAT.2 125.5,43.75 119.75,43.75 119.75,39.25 | U4.6 131.75,43 131,43 U4.9 | 129.75,39.25 129.75,37.5 128.5,36.25 128.5,27.5 123.25,27.5 C3.- | C1_BAT2.2 109,28.5 108.5,28 108.5,27.5 105.5,27.5 R1_PWRUSB.1 105.25,27.5 103.5,27.5 103.5,35 92.5,46 92.5,49.75 | C1_BAT1.2 112.25,25.5 109.25,28.5 C1_BAT2.2 | 114.75,29 109.25,29 109.25,28.75 C1_BAT2.2 | 114.75,29 115.25,29 IC4.2 | 115.5,33.5 114.75,32.75 114.75,29 | 115.5,33.5 116.75,34.75 C2_BAT.2 117,35 119,37 119,39.25 119.75,39.25 | 115.5,33.5 115.5,33.75 108.75,40.5 R2_BAT.1 | 119.75,39.25 120.5,39.25 MCP73831.2 | 92.5,49.75 87.25,49.75 C8.2 87,49.5 87,35.75 D3.1 87,35.5 86.25,34.75 86.25,26 90,22.25 90,13 | 92.5,49.75 92.5,50.75 C10_SUPERCAP.2 92.75,51 93.75,52 93.75,63.75 90.25,67.25 90.25,100.75 83.75,107.25 68.75,107.25 C10.2 67.25,106 66.75,106 CHANGE_BUTTON.2 66.5,106 63.25,106 CHANGE_BUTTON.1 63,105.75 62.25,105 v62.25,104.75
  Top 0.152: 65.5,12.75 66.5,13.75 R2.1 | 65.5,12.75 65.5,11.5 SJ1.1 | 74.5,15.5 72.5,17.5 72.5,18.25 EPD_C1.1 72.25,18.5 71.5,17.75 | 74.5,15.5 77,13 J3.MP2 | 71.5,17.75 70.5,16.75 R4.1 | 71.5,17.75 71.5,18 70,19.5 EPD_C2.1 69.75,19.5 68.5,19.5 68,19 68,18 66.75,18 64.75,16 64.75,12.75 65.5,12.75 | 90,13 87.5,13 87.5,13.5 86,15 86,15.25 J3.8 86,15.5 86,16.25 87,17.25 87,17.75 86.5,18.25 EPD_C12.1 86.25,18.5 85,18.5 EPD_C10.1 84.75,18.5 84,18.5 EPD_C9.1 83.75,18.5 82.75,18.5 EPD_C7.1 | 90,13 90.5,13 J3.MP1 | J3.17 81.5,15.5 81.5,17.25 82.5,18.25 EPD_C7.1 | EPD_C11.1 77.5,18.5 78.5,18.5 EPD_C5.1 78.75,18.5 80,19.75 EPD_C6.1 80.25,19.75 81.25,19.75 EPD_C8.1 | D6.1 76.75,29 76.75,19 77.25,18.5 EPD_C11.1 | EPD_C8.1 81.5,19.75 81.5,32.75 81.75,33 C7.2 81.75,33.25 81.75,52.25 U3.13 | EPD_C7.1 82.5,18.5 81.5,19.5 EPD_C8.1 | 74.5,15.5 77.25,18.25 EPD_C11.1 | 149.5,58.25 147.5,60.25 147.5,61.25 146.56,62.19 145.54,62.19 133.75,50.4 133.75,43.25 129.75,39.25 | 15.75,89 D8.1 | 15.75,89 16.75,88 J2.G2 | 15.75,89 15.75,83.25 16.75,82.25 J2.G1 | 10.5,97 3.75,97 3.75,92.25 J2.G4 3.75,92 3.75,89.5 | 10.5,97 11.25,97 C9.2 | 3.75,89.5 6,89.5 J2.P6 | 3.75,89.5 3.75,80.25 2.75,79.25 J2.G3 2.75,79 4.25,77.5 4.25,66.5 6,64.75 7.75,64.75 7.75,63.5 U2.28 8,63.25 8,55.5 | D8.1 14.5,96.5 12.5,96.5 12.5,93.75 11.5,92.75 10.5,92.75 10.5,97 | D8.1 16,95.25 16.5,95.75 v16.5,96.25 | TP5.TP 12.5,6.5 9,6.5 TP4.TP 8.75,6.5 8,7.25 8,45.75 U2.1 8,46 8,55.5 | 12.5,52 12.5,53 U2.29_2 | 13.75,52 13.75,53 U2.29_5 | 12.5,52 13.5,52 U2.29_4 13.75,52 | 12.5,52 U2.29_1 | 13.75,52 14.75,52 U2.29_7 15,52 15,53 U2.29_8 15,53.25 15,54.25 U2.29_9 14.75,54.5 13.75,54.5 U2.29_6 13.5,54.5 12.5,54.5 U2.29_3 12.25,54.5 11.75,55 v11.75,55.5
  Top 0.152: 8,55.5 v8.5,55.5 | IC1.3 48,99.5 46.75,99.5 46.75,104.75 47.75,105.75 RESET_BUTTON.1 48,106 51.25,106 RESET_BUTTON.2 51.5,105.75 51.5,103 | 51.5,103 51.5,102.75 53.25,101 C_DELAY.2 | 54.25,105.75 54.25,106.5 53.5,107.25 C5.2 | 51.5,103 54.25,105.75 | 54.25,105.75 v54.5,105.5 | BOOT_BUTTON.1 27.5,106 30.75,106 BOOT_BUTTON.2 31,106 33,106 C6.2 33.25,106 35.5,103.75 | 34.5,33.75 35.5,33.75 D11.1 35.75,33.5 v35.75,32.5 | 34.5,33.75 33.25,33.75 D12.1 | v38,32.5 38,33.5 D10.1 | 35.5,52.75 31.75,52.75 U1.4 | 35.5,52.75 35.5,54.5 U1.9 | 35.5,52.75 35.5,46.25 34.5,46.25 D9.1 34.5,46 34.5,33.75 | 35.5,52.75 U1.9 | 35.5,103.75 35.5,54.75 U1.9 | 35.5,103.75 v36.25,104.5 | v163.57,14.5 163.57,16.76 J4.1
  Bottom 0.152: v158.75,10.25 163,14.5 | 163,14.5 151.75,25.75 v151.75,28.75 | v8.5,55.5 v11.75,55.5 | v62.25,104.75 61.5,105.5 v54.5,105.5 53.5,104.5 v36.25,104.5 24.75,104.5 v16.5,96.25 | v35.75,32.5 v38,32.5 | 163,14.5 v163.57,14.5
  pour Top: -35.48,-34.31 -35.5,-34.33 -36.65,-35.48 214.55,-35.48 214.55,152.32 -35.48,152.32
  pour Bottom: 226.08,-44.37 226.1,-44.39 227.25,-45.54 227.25,153.59 226.06,153.59 -38.02,152.32 -38.02,-39.39 -38.04,-39.41 -43,-44.37
GPIO8
  Top 0.152: R1.1 22.75,41.5 19.5,44.75 19.5,45.75 U2.10
I2C_PW  (via drill 0.35)
  Top 0.152: R2-PINH.2 161.25,3 160.25,2 C2.1 160,2 158.75,2 C1.1 158.75,1.75 157.5,3 R1_PINH.2 157.5,3.25 157.5,4.75 158.75,6 SENSOR2.8 158.75,6.25 158,7 158,12 | SENSOR2.6 160.25,6.25 160.25,8 159.75,8.5 159.75,9 SENSOR2.2 159.5,9.25 159.5,10.5 158,12 | v21.25,47.75 21.5,48 21.5,63 21.75,63.25 U2.17 | 158,12 v139.25,30.75
  Bottom 0.152: v21.25,47.75 24.75,44.25 125.75,44.25 v139.25,30.75
INT_RTC  (via drill 0.35)
  Top 0.152: U3.3 83,62 83,65.5 81.25,65.5 80.75,65 R1_PINH1.1 78.92,63.06 76.49,63.06 68.5,55.07 v68.5,37.25 v68.49,37.24 | 60.5,29 60.96,29 61.25,28.71 61.25,3.5 62,2.75 TP17.TP | 60.5,29 60.25,29 59.75,28.5 59.75,25.46 59.29,25 34.75,25 17.25,42.5 17.25,45.5 17,45.75 U2.8 | 60.5,29 v60.5,29.25
  Bottom 0.152: v60.5,29.25 v68.49,37.24
IO/BOOT
  Top 0.152: C6.1 33,107.25 31,107.25 BOOT_BUTTON.3 30.75,107.5 27.5,107.5 BOOT_BUTTON.4 27.25,107.25 26.5,107.25 25.5,106.25 R_BOOT.1 25.25,106 25.25,64.25 24.5,63.5 U2.15
IO/CHANGE  (via drill 0.35)
  Top 0.152: 61.5,106.25 62,106.25 62,106.5 63,107.5 CHANGE_BUTTON.4 63.25,107.5 66.5,107.5 CHANGE_BUTTON.3 | 61.5,106.25 61,106.25 R_CHANGE.1 | 61.5,106.25 v61.5,104 66.5,104 68.5,106 C10.1 | v14.25,66.25 14.25,63.5 U2.23
  Bottom 0.152: v14.25,66.25 52,104 v61.5,104
MISO  (via drill 0.35)  (1 unrouted)
  Top 0.152: J2.P7 7.28,90.51 9.25,88.54 9.25,63.5 U2.27 9.25,63.25 v9.25,58.75 | R8.1 33,28.75 32.25,29.5 32.25,34.25 33,35 D12.2 33.25,35.25 33.5,35.5 v33.5,38 33.5,46.75 33.75,47 35,47 35,48.5 33.75,48.5 32.31,47.06 31.2,47.06 30.36,47.9 30.36,54 | v90.75,29.25 101,19 101,2.75 100.5,2.25 TP11.TP | U1.2 31.53,55.24 v30.67,54.38
  Bottom 0.152: v90.75,29.25 89.75,30.25 72.5,30.25 70.52,32.23 70.52,36.06 68.58,38 v33.5,38 | v9.25,58.75 10.75,57.25 22.75,57.25 25.61,54.38 v30.67,54.38
MOSI  (via drill 0.35)
  Top 0.152: v83,14.25 83,15.25 J3.14 | v88.75,19 88.75,23 v84.5,27.25 | 36.5,27.75 35.75,28.5 R7.1 | v39,36.5 39,52.25 U1.5 40.25,53.5 40.25,62 78.5,100.25 TP12.TP | 36.5,27.75 36.5,34.25 35.75,35 D11.2 | 36.5,27.75 v36.75,27.5 | v16,44.5 16,45.5 15.75,45.75 U2.7 15.5,46 15.5,55 14.75,55 11.75,58 11.75,60.87 v10.94,61.69 | v7.75,86 6.5,86 J2.P3
  Bottom 0.152: v83,14.25 85.5,16.75 86.5,16.75 v88.75,19 | v84.5,27.25 84.25,27.5 39.81,27.5 39,28.31 39,29.75 | 39,29.75 v39,36.5 24,36.5 v16,44.5 | 39,29.75 v36.75,27.5 | v7.75,86 7.75,64.5 8.2,64.06 8.2,60.66 8.37,60.48 8.63,60.48 9.83,61.69 v10.94,61.69
N$1
  Top 0.152: IC1.5 51,101.25 52.5,101.25 52.5,100.5 53.25,99.75 C_DELAY.1
N$2  (via drill 0.35)
  Top 0.152: v149.5,45.5 149.5,44.75 149.25,44.5 R2-USB.1 | v157,52 158.25,53.25 158.25,53.75 159.5,55 160,55 J1.B5
  Bottom 0.152: v149.5,45.5 156,52 v157,52
N$3
  Top 0.152: R2-USB1.2 150.25,47.25 150.25,54 152.09,55.84 154.22,55.84 156.25,53.8 156.25,48 156.75,47.5 159.25,47.5 159.25,51.75 159.5,52 160,52 J1.A5
N$4
  Top 0.152: 115.25,27.75 115.25,28.25 IC4.3 | 115.25,27.75 115.25,24.5 112,24.5 111.25,25.25 C1_BAT1.1 | 116.25,30 115.5,30 IC4.1 | 116.25,30 116.25,28.75 115.25,27.75 | 127,28.25 127.75,29 127.75,37 Q1.2 | 116.25,30 118.25,32 125.5,32 125.5,29 126.25,28.25 127,28.25 | 127,28.25 D2.1
N$5
  Top 0.152: 90.75,35 93.75,35 C4.1 | 90.75,35 90.75,35.5 D3.2 | 90.75,35 90.75,34 87.25,30.5 D4.1
N$6  (via drill 0.35)
  Top 0.152: v117,37.75 117,38 113.75,38 R1_BAT.2 | v119.75,37.5 120.5,38.25 MCP73831.1
  Bottom 0.152: v117,37.75 117.25,37.5 v119.75,37.5
N$7
  Top 0.152: CHG_LED.C 112.25,40.5 112.25,38.25 R1_BAT.1
N$8
  Top 0.152: R2_BAT.2 110,40.75 111.5,40.75 111.5,41 112,41.5 113,41.5 113,40.25 114.75,38.5 118,38.5 MCP73831.5
N$9  (via drill 0.35)
  Top 0.152: v88,20.25 88,15.5 J3.4 | v76,23.5 72.5,20 72.5,19.75 EPD_C1.2
  Bottom 0.152: v88,20.25 84.75,23.5 v76,23.5
N$10  (via drill 0.35)
  Top 0.152: v86.75,22.5 86.75,20.5 87.5,19.75 87.5,15.5 J3.5 | v68.75,18.75 69.75,18.75 69.75,18.5 EPD_C2.2
  Bottom 0.152: v86.75,22.5 85,24.25 74.25,24.25 v68.75,18.75
N$11  (via drill 0.35)
  Top 0.152: v77.75,16.75 77.75,15.75 78,15.5 J3.24 | v85.5,21.75 86.25,21 86.25,19.75 EPD_C12.2
  Bottom 0.152: v77.75,16.75 77.75,21.87 78.88,23 84.25,23 v85.5,21.75
N$13  (via drill 0.35)
  Top 0.152: v78.75,12.75 78.75,13.75 79,14 79,15.25 J3.22 | v85.5,20.75 85,20.25 85,19.75 EPD_C10.2
  Bottom 0.152: v78.75,12.75 80.5,12.75 84.5,16.75 85,16.75 85.5,17.25 v85.5,20.75
N$15
  Top 0.152: J3.20 80,15.5 80,16.75 81.25,18 81.25,18.25 EPD_C8.2
N$16  (via drill 0.35)
  Top 0.152: v80.5,14.25 80.5,15.25 J3.19 | v82.25,20.75 82.5,20.5 82.5,19.75 EPD_C7.2
  Bottom 0.152: v80.5,14.25 81.5,15.25 81.5,20.75 v82.25,20.75
N$17  (via drill 0.35)
  Top 0.152: v80.75,16.5 81,16.25 81,15.5 J3.18 | v79.75,17.5 80,17.75 80,18.25 EPD_C6.2
  Bottom 0.152: v79.75,17.5 v80.75,16.5
N$18
  Top 0.152: R_CAPACITOR.1 88.75,52.75 87.25,54.25 87.25,65 86.75,65.5 84.25,65.5 84.25,65 D7.1
PREVGH  (via drill 0.35)
  Top 0.152: v79.5,13.5 79.5,15.25 J3.21 | EPD_C9.2 83.75,19.75 v83.75,20.75 83.75,27.5 85,28.75 85,42.75 82.44,45.31 82.44,53.57 82.26,53.75 81.57,53.75 81.25,53.43 81.25,44.75 79.75,43.25 D5.1
  Bottom 0.152: v79.5,13.5 80.75,13.5 83.75,16.5 v83.75,20.75
PREVGL  (via drill 0.35)
  Top 0.152: v78.5,17.5 78.5,15.5 J3.23 | 77.75,20 77.5,19.75 EPD_C11.2 77.75,20 | 77.75,20 v78.5,20.75 | v90,25.75 90,29.75 90.5,30.25 D4.2 | v77.5,25 77.75,24.75 77.75,20
  Bottom 0.152: v78.5,20.75 v78.5,17.5 | v90,25.75 89.25,25 v77.5,25
RESE  (via drill 0.35)
  Top 0.152: 66.75,15.25 67.75,16.25 67.75,16.5 Q3.2 | 66.75,15.25 65.5,14 R2.2 | v88.5,14.25 88.5,15.25 J3.3 | 68.75,11.5 v69.75,11.5 | 68.75,11.5 68.75,12 R3.2 68.5,12.25 68.5,13.5 66.75,15.25 | 68.75,11.5 68.75,11 R3.1 | 68.75,11.5 67,11.5 SJ1.2
  Bottom 0.152: v88.5,14.25 85.75,11.5 v69.75,11.5
RESET  (via drill 0.35)
  Top 0.152: C5.1 53.25,106.25 52.25,107.25 51.5,107.25 RESET_BUTTON.3 51.25,107.5 48,107.5 RESET_BUTTON.4 47.75,107.25 46.5,107.25 46.5,106.75 45.75,106 | v10.25,58.75 10.25,46 U2.3 | v40.25,64.75 45.75,70.25 45.75,95.75 48.29,98.29 | 45.75,106 R_RESET.1 | 48.29,98.29 48.81,98.81 48.81,99.78 48.67,99.91 48.67,101.69 48.26,101.28 IC1.1 | 48.29,98.29 47.73,98.85 46.97,98.85 46.45,99.37 46.45,105.31 45.75,106
  Bottom 0.152: v10.25,58.75 16.25,64.75 v40.25,64.75
RTC_RST  (via drill 0.35)
  Top 0.152: v23.5,62 23.5,63 23.25,63.25 U2.16 | v81.25,63.25 81.75,62.75 81.75,62 U3.4
  Bottom 0.152: v23.5,62 24.75,63.25 v81.25,63.25
RX  (via drill 0.35)
  Top 0.152: v16,55.75 13.5,58.25 13.5,62.75 13,63.25 U2.24 | v41.5,49.25 64.25,26.5 64.25,4.5 66,2.75 TP2.TP
  Bottom 0.152: v16,55.75 22.5,49.25 v41.5,49.25
SCK  (via drill 0.35)
  Top 0.152: 38.25,35.25 38.25,35.75 38.25,53 39.25,54 U1.6 | 38.25,35.25 38.25,34.75 40.75,37.25 40.75,57.25 83.75,100.25 TP10.TP | 38.25,35.25 D10.2 38.25,35 39,34.25 39,27.75 | v70.5,12.25 70.5,12 81.75,12 83.75,14 83.75,14.5 83.5,14.75 83.5,15.25 J3.13 | 39,27.75 38.25,28.5 R6.1 | 39,27.75 v41,25.75 | v33,25.75 14.75,44 14.75,45.25 14.25,45.75 U2.6 14,46 14,47.5 v11.75,49.75 | J2.P5 6.32,88.25 5.81,88.25 5,87.44 v5,66.75
  Bottom 0.152: v70.5,12.25 57,25.75 v41,25.75 v33,25.75 | v5,66.75 7.75,64 7.75,49.75 v11.75,49.75
SCL  (via drill 0.35)
  Top 0.152: R2-PINH.1 161.5,2 162,2.5 162,8.25 161.25,9 SENSOR2.4 161.25,9.25 162.09,10.09 162.09,18.88 162.62,19.41 162.91,19.41 164.25,20.75 | 164.25,20.75 v163.5,21.5 | U4.7 132,43.5 v133,43.5 133,45 v123,55 | 164.25,20.75 J4.4 | v18.5,62 18.5,63 18.25,63.25 U2.20 | v83.75,55 85.5,53.25 85.5,52.5 U3.16
  Bottom 0.152: v133,43.5 146,30.5 154.5,30.5 v163.5,21.5 | v18.5,62 25.5,55 v83.75,55 v123,55
SDA  (via drill 0.35)
  Top 0.152: R1_PINH.1 157.5,1.75 158,1.25 161.77,1.25 162.39,1.87 162.39,18.75 162.75,19.11 163.91,19.11 J4.3 164.5,19.75 165.5,18.75 165.5,22.25 | 165.5,22.25 163.25,22.25 160.5,19.5 160.5,9.25 SENSOR2.3 | U4.8 131.75,44 v121.75,54 121.75,54.61 128.62,61.48 144.4,61.48 145.41,62.49 146.69,62.49 147.7,61.48 164.27,61.48 166,59.75 166,22.75 165.5,22.25 | U3.15 84.25,52.5 84.25,53.5 v83.75,54 v82,55.75 | v19.75,62 19.75,63 19.5,63.25 U2.19
  Bottom 0.152: v83.75,54 v121.75,54 | v19.75,62 26,55.75 v82,55.75
SRC  (via drill 0.35)
  Top 0.152: v91.75,36.25 93.75,36.25 C4.2 | v84,42.25 83.25,43 D5.2 | v72.75,31 72.75,24.25 67.5,19 Q3.3 | v77.67,37.49 77.67,38.1 L1.1
  Bottom 0.152: v91.75,36.25 85.75,42.25 v84,42.25 79.09,37.34 | 79.09,37.34 78.46,36.71 | 78.46,36.71 v72.75,31 | 78.46,36.71 v77.67,37.49 | 79.1,37.34 79.09,37.34
SS_SD  (via drill 0.35)
  Top 0.152: 16,81 15,82 15,94.75 14,95.75 R10.1 | 16,81 18.25,81 18.25,94.5 17.5,95.25 D8.2 | v11,60.75 11,49.5 11.25,49.25 11.25,46.25 11.5,46 U2.4 | v15,64.75 16,65.75 16,81 | v8.5,66.25 8.5,83.5 7,85 J2.P2
  Bottom 0.152: v15,64.75 12.46,64.75 11.87,64.16 | 11.87,64.16 8.5,60.79 v8.5,66.25 | v11,60.75 11.87,61.62 11.87,64.16
TX  (via drill 0.35)
  Top 0.152: v14.25,56.5 12.25,58.5 12.25,62.75 11.75,63.25 U2.25 | v87.75,48 102,33.75 102,4.25 104,2.25 TP1.TP
  Bottom 0.152: v14.25,56.5 23,56.5 29.5,50 85.75,50 v87.75,48
USB_D+  (via drill 0.35)
  Top 0.152: v147.25,51 148.5,51 D1.3 | v25.5,46.5 24.5,46.5 24.5,46 U2.14
  Bottom 0.152: v147.25,51 142.75,46.5 v25.5,46.5
USB_D-  (via drill 0.35)
  Top 0.152: v146,53 148.5,53 D1.1 | v24.25,47.25 23.25,46.25 23.25,46 U2.13
  Bottom 0.152: v146,53 140.25,47.25 v24.25,47.25
VBAT  (via drill 0.35)
  Top 0.152: 129.75,43.25 129.75,43.5 U4.2 | 129.75,43.25 129.75,43 U4.3 | 129,42.5 129,41.25 127,39.25 Q1.3 | 129.75,43.25 129,42.5 | 120.75,40.5 121.75,39.5 121.75,33.75 117,33.75 C2_BAT.1 116.75,33.5 v116,32.75 | v102.75,29.25 102.75,7.25 107.75,2.25 TP3.TP | 129,42.5 126.5,42.5 126.5,43 126.25,43.25 120.75,43.25 120.75,40.5 | 120.75,40.5 MCP73831.3
  Bottom 0.152: v102.75,29.25 106.25,32.75 v116,32.75
VBUS  (via drill 0.35)
  Top 0.152: 145.27,34.23 151.5,28 151.86,28 153.23,29.37 153.23,52.4 154.35,53.52 154.35,54.41 153.67,55.08 C5_USB.1 153.5,55.25 152,53.75 152,52.25 | 145.27,34.23 144.09,35.41 141.75,33.06 v141.75,29.25 | 152,52.25 151.25,52.25 D1.5 | 152,52.25 152,40.5 151,39.5 PFMF.050.1.2 | C1_BAT.1 125.75,42.5 126,42.25 126,37.25 Q1.1 126.25,37 126.25,31.25 127,30.5 D2.2 126.25,29.5 v126.25,29.25 | MCP73831.4 118,40.5 114,40.5 CHG_LED.A 113.75,40.75 113.75,42 108.75,42 107.75,41 107.75,31 105.5,28.75 R1_PWRUSB.2 105.25,28.5 v104.25,28.5 | v60.5,28.25 60.5,4.75 58.5,2.75 TP16.TP | C4_USB.1 144.78,52.54 144.1,51.87 144.1,50.98 145.27,49.81 145.27,34.23
  Bottom 0.152: v60.5,28.25 60.75,28.5 v104.25,28.5 125.5,28.5 v126.25,29.25 v141.75,29.25
VRTC
  Top 0.152: U3.14 83.25,52.25 83.25,52 85.5,49.75 C8.1 85.75,49.75 87.25,51.25 88.75,51.25 R_CAPACITOR.2 89,51.5 89.5,51.5 91,53 92.5,53 C10_SUPERCAP.1
VUSB  (4 unrouted)